# Altium PCB AN9767-2017-05-03.PcbDoc
Units mil, origin at the board's own origin, x right, y up, seen from the top; angles counter-clockwise.
Board outline 3187.61 x 2011 mil, 4 copper layers (TOP, SGND, SVCC, BOTTOM), stack 28.8 mil thick; 3 components, 72 nets, 50 pads, 0 vias.
Unrouted connection lines stored in the file: 7.
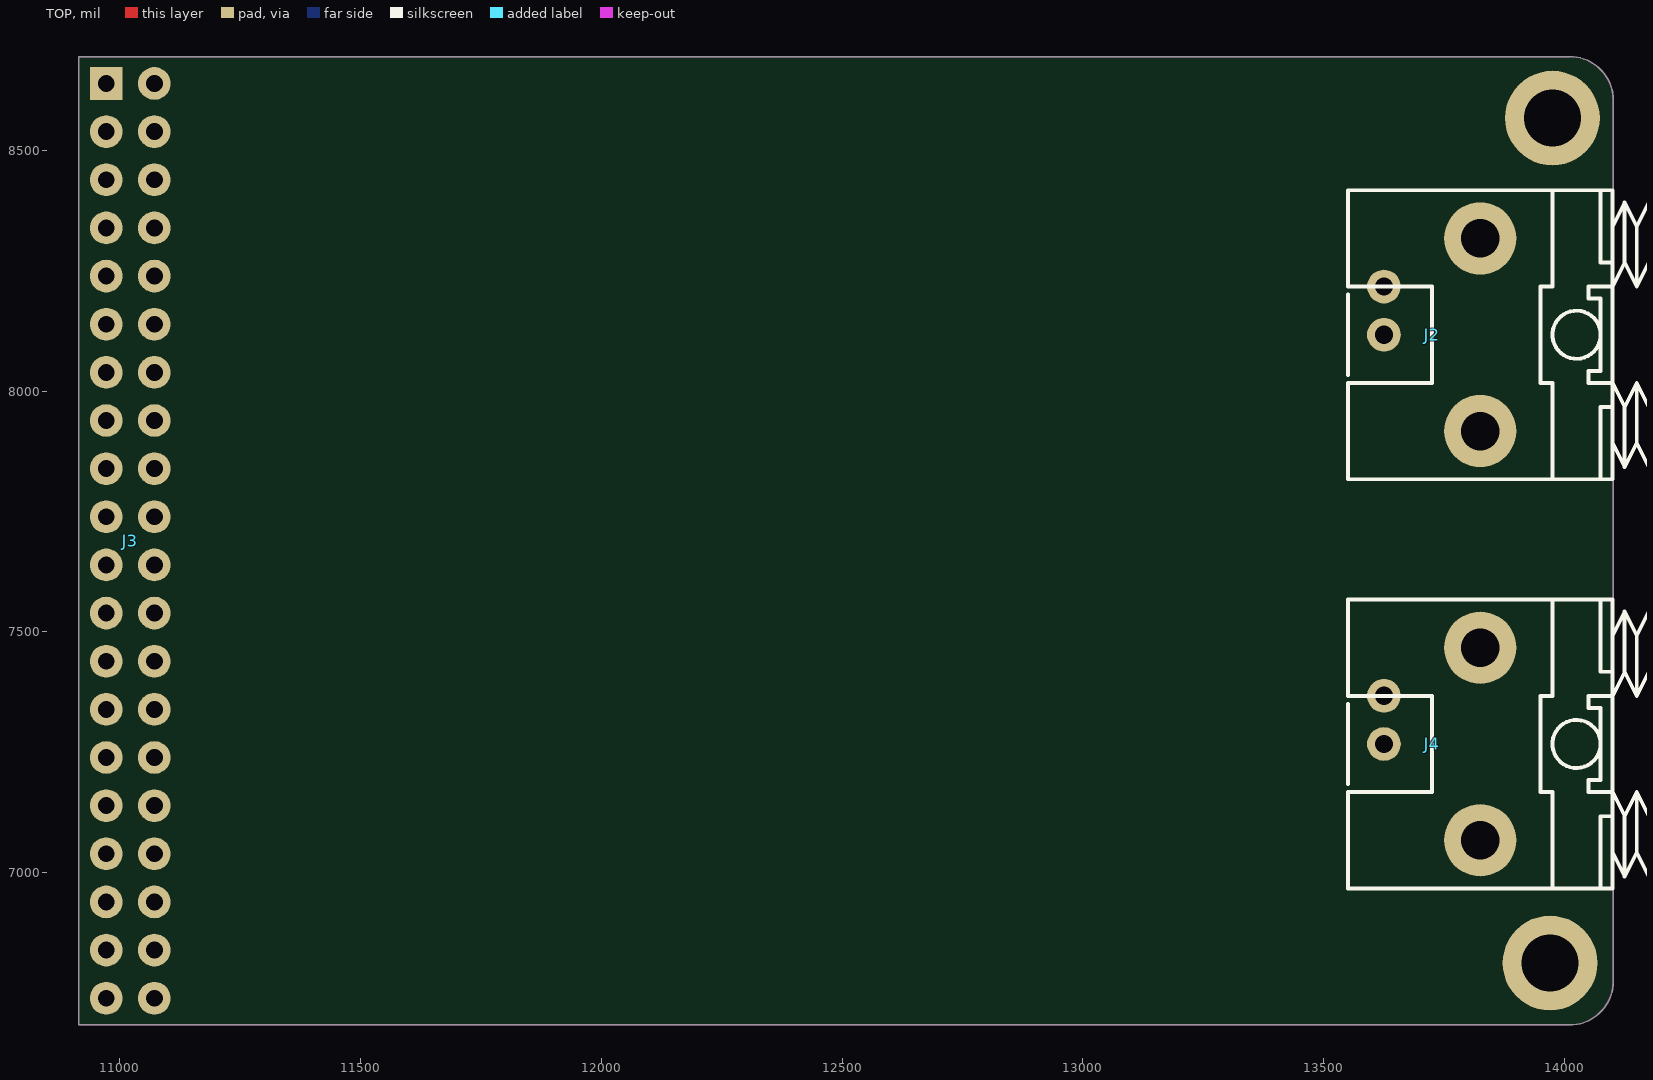
[diagram p0: TOP view]
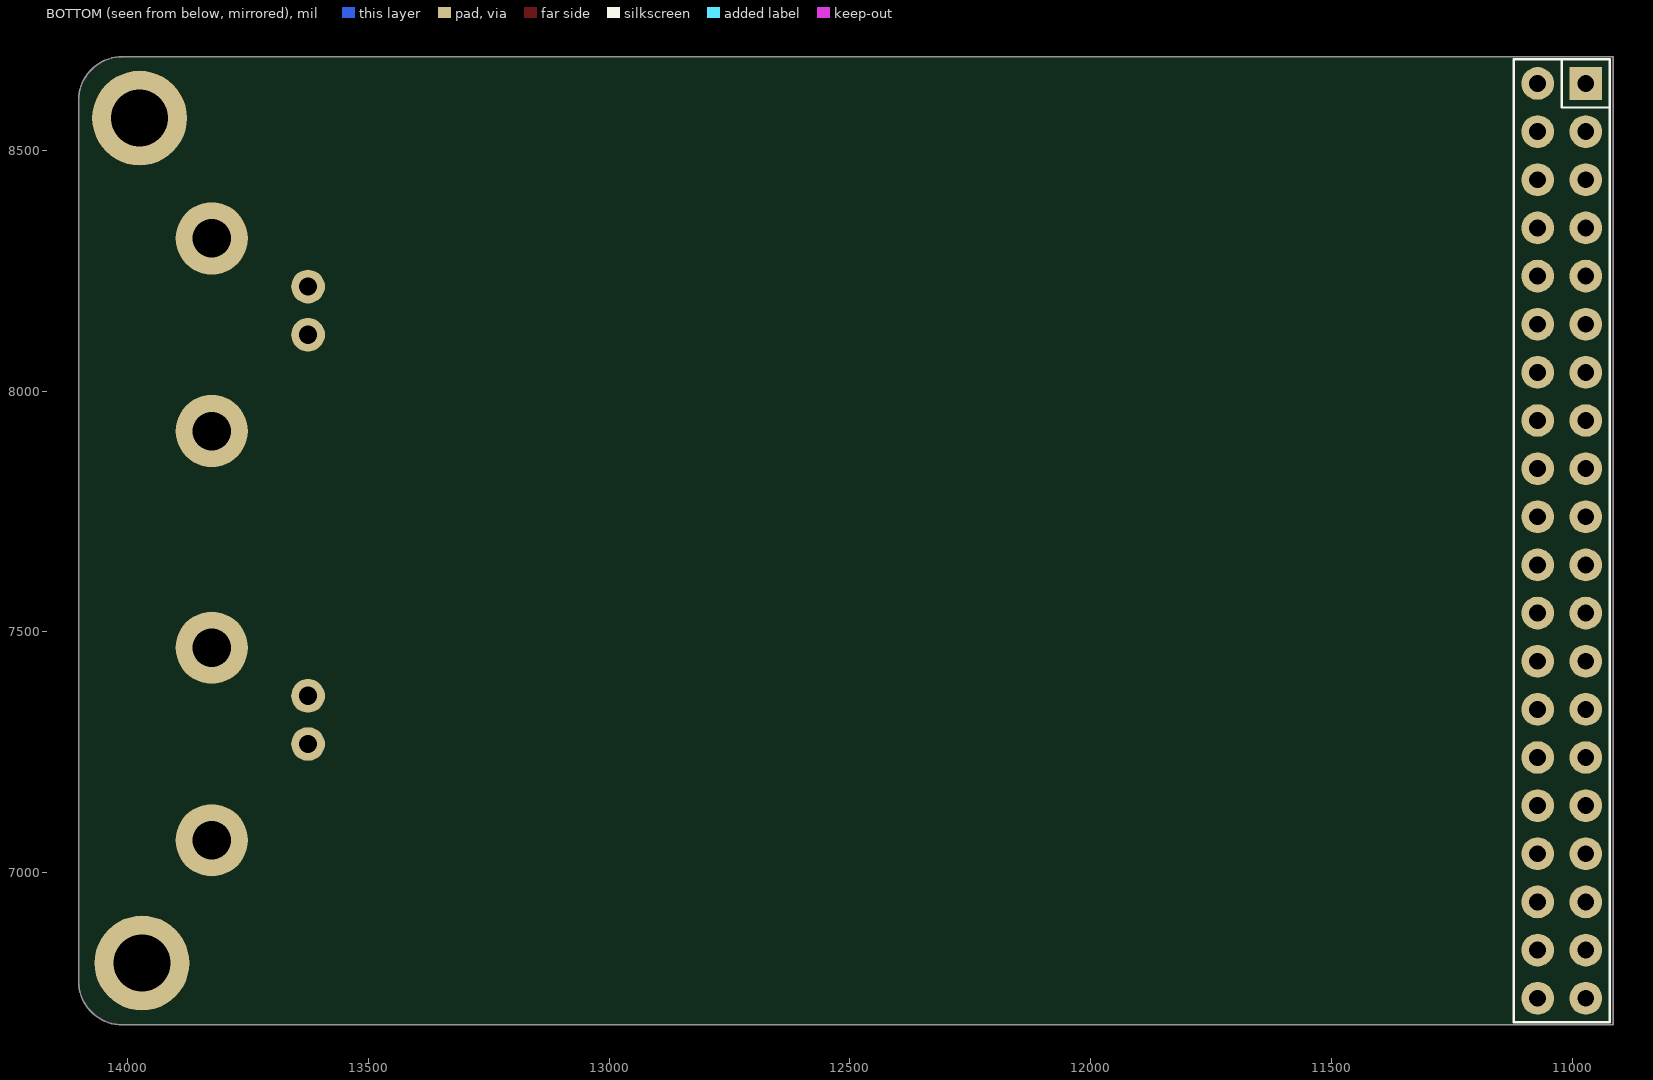
[diagram p1: BOTTOM view, seen from below]
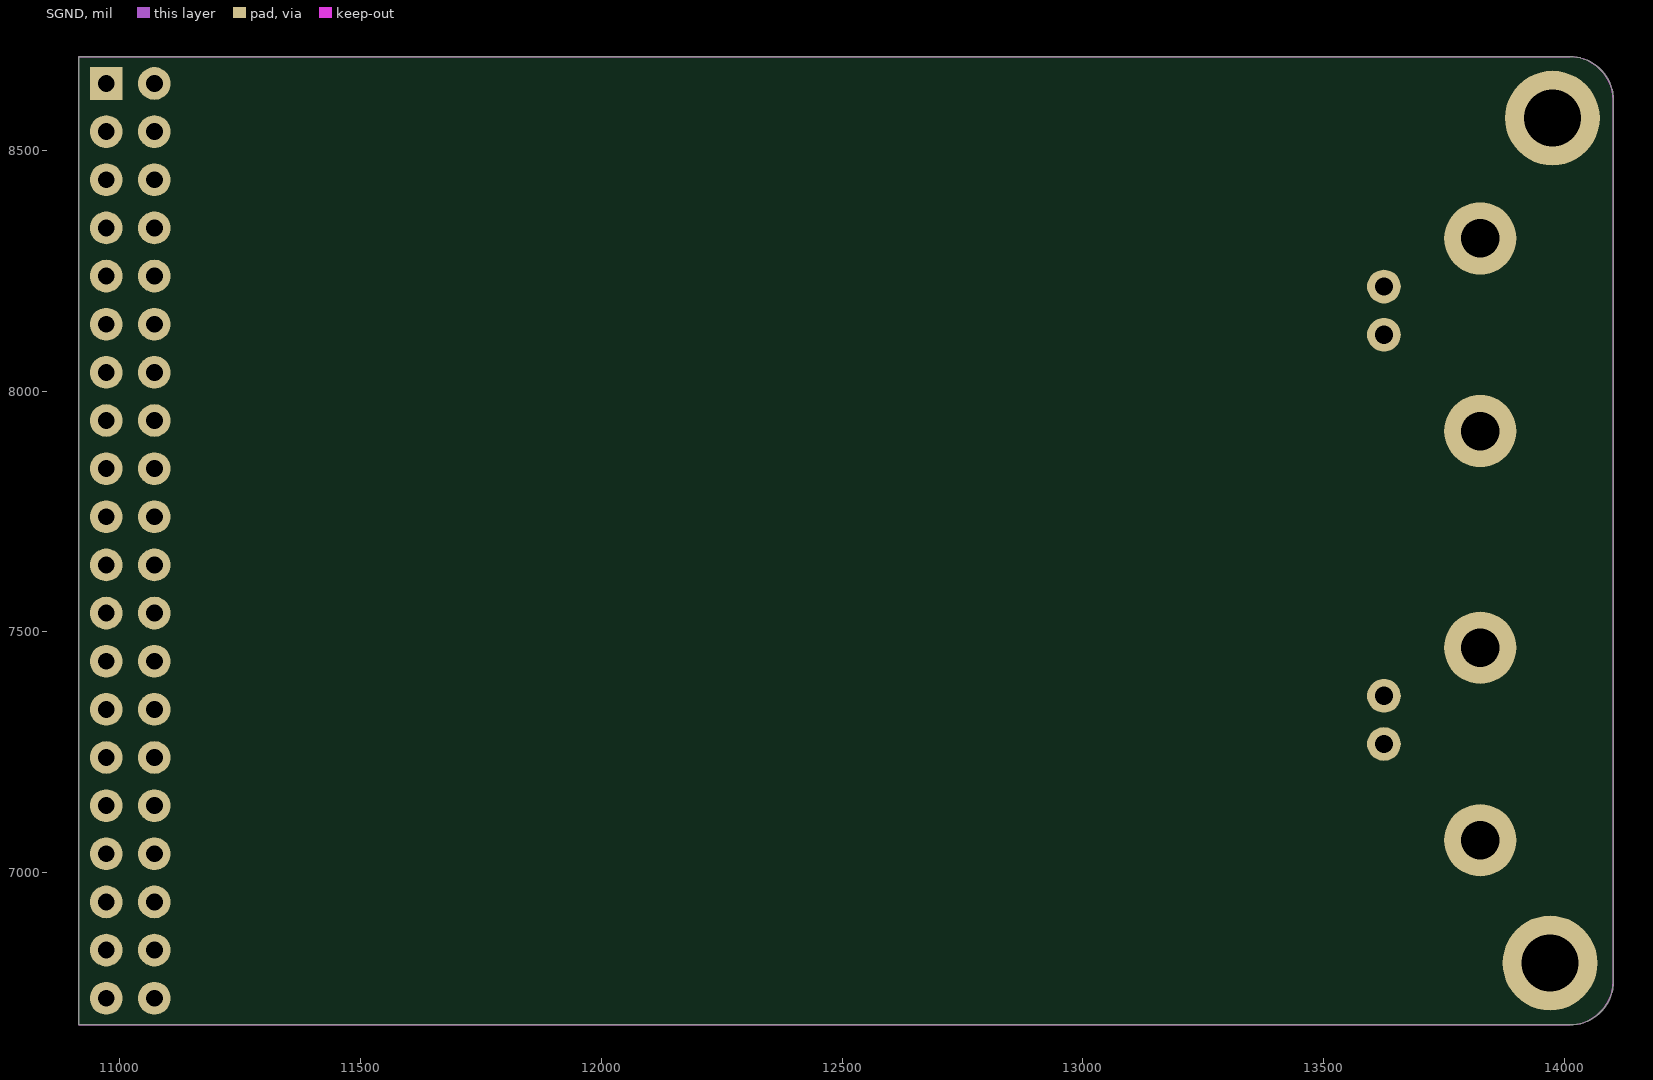
[diagram p2: SGND]

## Layer stack, top to bottom
Top Solder: solder mask 0.4, Solder Resist, Dk 3.5
TOP: signal copper 1.2
Dielectric 1: core 8, FR-4, Dk 4.5
SGND: signal copper 1.2
Dielectric2: core 8, FR-4, Dk 4.5
SVCC: signal copper 1.2
Dielectric3: core 8, FR-4, Dk 4.5
BOTTOM: signal copper 1.2
Bottom Solder: solder mask 0.4, Solder Resist, Dk 3.5

## Board outline
10914.29,6684.32 10914.79,6683.82 14011.4,6683.82 ccw(c14011.4,6774.32) 14101.9,6774.32 14101.9,8604.32 ccw(c14011.4,8604.32) 14011.4,8694.82 10914.79,8694.82 10914.29,8694.32

## Design rules (kind name [scope] priority, off if disabled: settings)
Clearance [All] p1: gap=10
PlaneConnect [All] p1: planeconnectstyle=Direct reliefexpansion=20 reliefentries=4 reliefconductorwidth=10 reliefairgap=10
PolygonConnect [All] p1: connectstyle=Direct reliefconductorwidth=10 reliefentries=4 polygonreliefangle="90 Angle" airgapwidth=10
RoutingVias [All] p1: holewidth=28 width=50 viastyle="Through Hole" minholewidth=28 minwidth=50 maxholewidth=28 maxwidth=50
SolderMaskExpansion [All] p1: expansion=4
Width [All] p1: maxlimit=10 minlimit=10 preferedwidth=10 impedancedriven=TRUE minimp=60.000000 maximp=60.000000 favimp=60.000000
29 further rules are at their usual default settings.

## Components (designator, comment, footprint, x,y, rotation, side; value= is the part's Value field where it differs from the comment)
J2 "HEADER 2_0_BNC_DACOUT" BNC 13745.4,8117.22 r90 top
J3 "CONN PCB 20X2-S_IDC-40P_CONN PC" IDC-40P 11021.5,7689.13 r270 top
J4 "HEADER 2_0_BNC_DACOUT" BNC 13745.4,7267.22 r90 top

## Footprints (in the part's own frame and the unit in brackets; to place one, negate y for a bottom-side part, rotate by r counter-clockwise, add the part's x,y. Pads: shape width x height; smd on the part's side, far side on the other; paste and mask are expansions set on the pad)
BNC [mil] "BNC"
  round 70 hole 38: 1(0,120) 2(100,120)
  round 150 hole 80: 3(-200,-80) 4(200,-80)
  silkscreen extent -300,-922 300,195, body extent -275,-155 275,155, height 150
IDC-40P [mil] "IDC-40P"
  rect 68x68 hole 35: 1(-950,-50)
  round 68 hole 35: 2(-950,50) 3(-850,-50) 4(-850,50) 5(-750,-50) 6(-750,50) 7(-650,-50) 8(-650,50) 9(-550,-50) 10(-550,50) 11(-450,-50) 12(-450,50) 13(-350,-50) 14(-350,50) 15(-250,-50) 16(-250,50) 17(-150,-50) 18(-150,50) 19(-50,-50) 20(-50,50) 21(50,-50) 22(50,50) 23(150,-50) 24(150,50) 25(250,-50) 26(250,50) 27(350,-50) 28(350,50) 29(450,-50) 30(450,50) 31(550,-50) 32(550,50) 33(650,-50) 34(650,50) 35(750,-50) 36(750,50) 37(850,-50) 38(850,50) 39(950,-50) 40(950,50)
  body extent -984,-84 984,84, height 150

## Free pads (board coordinates)
  round 196.85 hole 118.11: 1(13970.4,6812.22) 1(13975.4,8567.22)

## Nets (pads, with @x,y where several pads share a name; then routed paths per layer and width w, separated by ;. In a path a pad name is that pad's centre, name@x,y a point inside that pad or via, vN(x,y) a via of type N, cw(c..) or ccw(c..) an arc to the next point about the centre after c; other vN are vias at no path point)
+5V: J3.2
+6V: 
+6V_AD1: 
+6V_AD2: 
-6V: 
-6V_AD1: 
-6V_AD2: 
A3V3: 
ACOM: J2.2 J2.3 J2.4 J4.2 J4.3 J4.4
D3V3: 
DCOM: J3.1 J3.37 J3.38
N16799601: 
N16799607: 
N16799608: 
N16799613: 
N16799683: 
N16799684: 
N16799689: 
N16799690: 
N16799693: 
N16799695: J2.1
N16799698: 
N16799708: 
N16799709: 
N16799715: 
N16799717: 
N16799719: J4.1
N16799722: 
N16799809: 
N16799825: 
N16799830: 
N16802121: 
N16802139: 
N16802151: 
N16802153: 
N16804035: 
N16804039: 
N16804049: 
N16804061: 
N16804479: 
P1_CLK: J3.18
P1_DATA0: J3.16
P1_DATA1: J3.15
P1_DATA2: J3.14
P1_DATA3: J3.13
P1_DATA4: J3.12
P1_DATA5: J3.11
P1_DATA6: J3.10
P1_DATA7: J3.9
P1_DATA8: J3.8
P1_DATA9: J3.7
P1_DATA10: J3.6
P1_DATA11: J3.5
P1_DATA12: J3.4
P1_DATA13: J3.3
P1_WRT: J3.17
P2_CLK: J3.19
P2_DATA0: J3.34
P2_DATA1: J3.33
P2_DATA2: J3.32
P2_DATA3: J3.31
P2_DATA4: J3.30
P2_DATA5: J3.29
P2_DATA6: J3.28
P2_DATA7: J3.27
P2_DATA8: J3.26
P2_DATA9: J3.25
P2_DATA10: J3.24
P2_DATA11: J3.23
P2_DATA12: J3.22
P2_DATA13: J3.21
P2_WRT: J3.20
pads on no net: J3.35 J3.36 J3.39 J3.40

## Keep-outs
Keep-Out Layer:
  lines w1: 10914.79,6684.32 14003.5,6684.32 14011.4,6684.32 ccw(c14011.4,6774.32) 14101.4,6774.32 14101.4,8604.32 ccw(c14011.4,8604.32) 14011.4,8694.32 10914.79,8694.32 10914.79,6684.32

## Other copper
SGND:
  pour cut-out: 0,0 10,0 10,10 0,10
  pour cut-out: 0,0 10,0 10,10 0,10
  pour cut-out: 0,0 10,0 10,10 0,10
  pour cut-out: 0,0 10,0 10,10 0,10
  pour cut-out: 0,0 10,0 10,10 0,10
  pour cut-out: 0,0 10,0 10,10 0,10
  pour cut-out: 0,0 10,0 10,10 0,10
  pour cut-out: 0,0 10,0 10,10 0,10
  pour cut-out: 0,0 10,0 10,10 0,10
  pour cut-out: 0,0 10,0 10,10 0,10
  pour cut-out: 0,0 10,0 10,10 0,10
  pour cut-out: 0,0 10,0 10,10 0,10
  pour cut-out: 0,0 10,0 10,10 0,10
  pour cut-out: 0,0 10,0 10,10 0,10
  pour cut-out: 0,0 10,0 10,10 0,10
  pour cut-out: 0,0 10,0 10,10 0,10
  pour cut-out: 0,0 10,0 10,10 0,10
  pour cut-out: 0,0 10,0 10,10 0,10
  pour cut-out: 0,0 10,0 10,10 0,10
  pour cut-out: 0,0 10,0 10,10 0,10
  pour cut-out: 0,0 10,0 10,10 0,10
  pour cut-out: 0,0 10,0 10,10 0,10
  pour cut-out: 0,0 10,0 10,10 0,10
  pour cut-out: 0,0 10,0 10,10 0,10
  pour cut-out: 0,0 10,0 10,10 0,10
  pour cut-out: 0,0 10,0 10,10 0,10
  pour cut-out: 0,0 10,0 10,10 0,10
  pour cut-out: 0,0 10,0 10,10 0,10
  pour cut-out: 0,0 10,0 10,10 0,10
  pour cut-out: 0,0 10,0 10,10 0,10
  pour cut-out: 0,0 10,0 10,10 0,10
  pour cut-out: 0,0 10,0 10,10 0,10
  pour cut-out: 0,0 10,0 10,10 0,10
  pour cut-out: 0,0 10,0 10,10 0,10
  pour cut-out: 0,0 10,0 10,10 0,10
  pour cut-out: 0,0 10,0 10,10 0,10
  pour cut-out: 0,0 10,0 10,10 0,10
  pour cut-out: 0,0 10,0 10,10 0,10
  pour cut-out: 0,0 10,0 10,10 0,10
  pour cut-out: 0,0 10,0 10,10 0,10
  pour cut-out: 0,0 10,0 10,10 0,10
  pour cut-out: 0,0 10,0 10,10 0,10
  pour cut-out: 0,0 10,0 10,10 0,10
  pour cut-out: 0,0 10,0 10,10 0,10
  pour cut-out: 0,0 10,0 10,10 0,10
  pour cut-out: 0,0 10,0 10,10 0,10
  pour cut-out: 0,0 10,0 10,10 0,10
  pour cut-out: 0,0 10,0 10,10 0,10
  pour cut-out: 0,0 10,0 10,10 0,10
  pour cut-out: 0,0 10,0 10,10 0,10
  pour cut-out: 0,0 10,0 10,10 0,10
  pour cut-out: 0,0 10,0 10,10 0,10
  pour cut-out: 0,0 10,0 10,10 0,10
  pour cut-out: 0,0 10,0 10,10 0,10
  pour cut-out: 0,0 10,0 10,10 0,10
  pour cut-out: 0,0 10,0 10,10 0,10
  pour cut-out: 0,0 10,0 10,10 0,10
  pour cut-out: 0,0 10,0 10,10 0,10
  pour cut-out: 0,0 10,0 10,10 0,10
  pour cut-out: 0,0 10,0 10,10 0,10
  pour cut-out: 0,0 10,0 10,10 0,10
  pour cut-out: 0,0 10,0 10,10 0,10
  pour cut-out: 0,0 10,0 10,10 0,10
  pour cut-out: 0,0 10,0 10,10 0,10
  pour cut-out: 0,0 10,0 10,10 0,10
  pour cut-out: 0,0 10,0 10,10 0,10
  pour cut-out: 0,0 10,0 10,10 0,10
  pour cut-out: 0,0 10,0 10,10 0,10
  pour cut-out: 0,0 10,0 10,10 0,10
  pour cut-out: 0,0 10,0 10,10 0,10
  pour cut-out: 0,0 10,0 10,10 0,10
  pour cut-out: 0,0 10,0 10,10 0,10
  pour cut-out: 0,0 10,0 10,10 0,10
  pour cut-out: 0,0 10,0 10,10 0,10
  pour cut-out: 0,0 10,0 10,10 0,10
  pour cut-out: 0,0 10,0 10,10 0,10
  pour cut-out: 0,0 10,0 10,10 0,10
  pour cut-out: 0,0 10,0 10,10 0,10
  pour cut-out: 0,0 10,0 10,10 0,10
  pour cut-out: 0,0 10,0 10,10 0,10
  pour cut-out: 13667.78,7267.22 13666.34,7278.19 13662.1,7288.41 13655.37,7297.19 13646.59,7303.92 13636.37,7308.16 13625.4,7309.6 13614.43,7308.16 13604.21,7303.92 13595.43,7297.19 13588.7,7288.41 13584.46,7278.19 13583.02,7267.22 13584.46,7256.25 13588.7,7246.03 13595.43,7237.25 13604.21,7230.52 13614.43,7226.28 13625.4,7224.84 13636.37,7226.28 13646.59,7230.52 13655.37,7237.25 13662.1,7246.03 13666.34,7256.25 13667.78,7267.22
  pour cut-out: 13667.78,7367.22 13666.34,7378.19 13662.1,7388.41 13655.37,7397.19 13646.59,7403.92 13636.37,7408.16 13625.4,7409.6 13614.43,7408.16 13604.21,7403.92 13595.43,7397.19 13588.7,7388.41 13584.46,7378.19 13583.02,7367.22 13584.46,7356.25 13588.7,7346.03 13595.43,7337.25 13604.21,7330.52 13614.43,7326.28 13625.4,7324.84 13636.37,7326.28 13646.59,7330.52 13655.37,7337.25 13662.1,7346.03 13666.34,7356.25 13667.78,7367.22
  pour cut-out: 13667.78,8117.22 13666.34,8128.19 13662.1,8138.41 13655.37,8147.19 13646.59,8153.92 13636.37,8158.16 13625.4,8159.6 13614.43,8158.16 13604.21,8153.92 13595.43,8147.19 13588.7,8138.41 13584.46,8128.19 13583.02,8117.22 13584.46,8106.25 13588.7,8096.03 13595.43,8087.25 13604.21,8080.52 13614.43,8076.28 13625.4,8074.84 13636.37,8076.28 13646.59,8080.52 13655.37,8087.25 13662.1,8096.03 13666.34,8106.25 13667.78,8117.22
  pour cut-out: 13667.78,8217.22 13666.34,8228.19 13662.1,8238.41 13655.37,8247.19 13646.59,8253.92 13636.37,8258.16 13625.4,8259.6 13614.43,8258.16 13604.21,8253.92 13595.43,8247.19 13588.7,8238.41 13584.46,8228.19 13583.02,8217.22 13584.46,8206.25 13588.7,8196.03 13595.43,8187.25 13604.21,8180.52 13614.43,8176.28 13625.4,8174.84 13636.37,8176.28 13646.59,8180.52 13655.37,8187.25 13662.1,8196.03 13666.34,8206.25 13667.78,8217.22
  pour cut-out: 13907.82,7067.22 13906.23,7083.3 13901.54,7098.76 13893.93,7113.01 13883.68,7125.5 13871.19,7135.75 13856.94,7143.36 13841.48,7148.05 13825.4,7149.64 13809.32,7148.05 13793.86,7143.36 13779.61,7135.75 13767.12,7125.5 13756.87,7113.01 13749.26,7098.76 13744.57,7083.3 13742.98,7067.22 13744.57,7051.14 13749.26,7035.68 13756.87,7021.43 13767.12,7008.94 13779.61,6998.69 13793.86,6991.08 13809.32,6986.39 13825.4,6984.8 13841.48,6986.39 13856.94,6991.08 13871.19,6998.69 13883.68,7008.94 13893.93,7021.43 13901.54,7035.68 13906.23,7051.14 13907.82,7067.22
  pour cut-out: 13907.82,7467.22 13906.23,7483.3 13901.54,7498.76 13893.93,7513.01 13883.68,7525.5 13871.19,7535.75 13856.94,7543.36 13841.48,7548.05 13825.4,7549.64 13809.32,7548.05 13793.86,7543.36 13779.61,7535.75 13767.12,7525.5 13756.87,7513.01 13749.26,7498.76 13744.57,7483.3 13742.98,7467.22 13744.57,7451.14 13749.26,7435.68 13756.87,7421.43 13767.12,7408.94 13779.61,7398.69 13793.86,7391.08 13809.32,7386.39 13825.4,7384.8 13841.48,7386.39 13856.94,7391.08 13871.19,7398.69 13883.68,7408.94 13893.93,7421.43 13901.54,7435.68 13906.23,7451.14 13907.82,7467.22
  pour cut-out: 13907.82,7917.22 13906.23,7933.3 13901.54,7948.76 13893.93,7963.01 13883.68,7975.5 13871.19,7985.75 13856.94,7993.36 13841.48,7998.05 13825.4,7999.64 13809.32,7998.05 13793.86,7993.36 13779.61,7985.75 13767.12,7975.5 13756.87,7963.01 13749.26,7948.76 13744.57,7933.3 13742.98,7917.22 13744.57,7901.14 13749.26,7885.68 13756.87,7871.43 13767.12,7858.94 13779.61,7848.69 13793.86,7841.08 13809.32,7836.39 13825.4,7834.8 13841.48,7836.39 13856.94,7841.08 13871.19,7848.69 13883.68,7858.94 13893.93,7871.43 13901.54,7885.68 13906.23,7901.14 13907.82,7917.22
  pour cut-out: 13907.82,8317.22 13906.23,8333.3 13901.54,8348.76 13893.93,8363.01 13883.68,8375.5 13871.19,8385.75 13856.94,8393.36 13841.48,8398.05 13825.4,8399.64 13809.32,8398.05 13793.86,8393.36 13779.61,8385.75 13767.12,8375.5 13756.87,8363.01 13749.26,8348.76 13744.57,8333.3 13742.98,8317.22 13744.57,8301.14 13749.26,8285.68 13756.87,8271.43 13767.12,8258.94 13779.61,8248.69 13793.86,8241.08 13809.32,8236.39 13825.4,8234.8 13841.48,8236.39 13856.94,8241.08 13871.19,8248.69 13883.68,8258.94 13893.93,8271.43 13901.54,8285.68 13906.23,8301.14 13907.82,8317.22
  pour cut-out: 0,0 10,0 10,10 0,10
  pour cut-out: 0,0 10,0 10,10 0,10
  pour cut-out: 0,0 10,0 10,10 0,10
  pour cut-out: 0,0 10,0 10,10 0,10
  pour cut-out: 0,0 10,0 10,10 0,10
  pour cut-out: 0,0 10,0 10,10 0,10
  pour cut-out: 0,0 10,0 10,10 0,10
  pour cut-out: 0,0 10,0 10,10 0,10
  pour cut-out: 0,0 10,0 10,10 0,10
  pour cut-out: 0,0 10,0 10,10 0,10
  pour cut-out: 0,0 10,0 10,10 0,10
  pour cut-out: 0,0 10,0 10,10 0,10
BOTTOM:
  pour cut-out: 0,0 10,0 10,10 0,10
  pour cut-out: 0,0 10,0 10,10 0,10
  pour cut-out: 0,0 10,0 10,10 0,10
  pour cut-out: 0,0 10,0 10,10 0,10
  pour cut-out: 0,0 10,0 10,10 0,10
  pour cut-out: 0,0 10,0 10,10 0,10
  pour cut-out: 0,0 10,0 10,10 0,10
  pour cut-out: 0,0 10,0 10,10 0,10
  pour cut-out: 0,0 10,0 10,10 0,10
  pour cut-out: 0,0 10,0 10,10 0,10
  pour cut-out: 0,0 10,0 10,10 0,10
  pour cut-out: 0,0 10,0 10,10 0,10
  pour cut-out: 0,0 10,0 10,10 0,10
  pour cut-out: 0,0 10,0 10,10 0,10
  pour cut-out: 0,0 10,0 10,10 0,10
  pour cut-out: 0,0 10,0 10,10 0,10
  pour cut-out: 0,0 10,0 10,10 0,10
  pour cut-out: 0,0 10,0 10,10 0,10
  pour cut-out: 0,0 10,0 10,10 0,10
  pour cut-out: 0,0 10,0 10,10 0,10
  pour cut-out: 0,0 10,0 10,10 0,10
  pour cut-out: 0,0 10,0 10,10 0,10
  pour cut-out: 0,0 10,0 10,10 0,10
  pour cut-out: 0,0 10,0 10,10 0,10
  pour cut-out: 0,0 10,0 10,10 0,10
  pour cut-out: 0,0 10,0 10,10 0,10
  pour cut-out: 0,0 10,0 10,10 0,10
  pour cut-out: 0,0 10,0 10,10 0,10
  pour cut-out: 0,0 10,0 10,10 0,10
  pour cut-out: 0,0 10,0 10,10 0,10
  pour cut-out: 0,0 10,0 10,10 0,10
  pour cut-out: 0,0 10,0 10,10 0,10
  pour cut-out: 0,0 10,0 10,10 0,10
  pour cut-out: 0,0 10,0 10,10 0,10
  pour cut-out: 0,0 10,0 10,10 0,10
  pour cut-out: 0,0 10,0 10,10 0,10
  pour cut-out: 0,0 10,0 10,10 0,10
  pour cut-out: 0,0 10,0 10,10 0,10
  pour cut-out: 0,0 10,0 10,10 0,10
  pour cut-out: 0,0 10,0 10,10 0,10
  pour cut-out: 0,0 10,0 10,10 0,10
  pour cut-out: 0,0 10,0 10,10 0,10
  pour cut-out: 0,0 10,0 10,10 0,10
  pour cut-out: 0,0 10,0 10,10 0,10
  pour cut-out: 0,0 10,0 10,10 0,10
  pour cut-out: 0,0 10,0 10,10 0,10
  pour cut-out: 0,0 10,0 10,10 0,10
  pour cut-out: 0,0 10,0 10,10 0,10
  pour cut-out: 0,0 10,0 10,10 0,10
  pour cut-out: 0,0 10,0 10,10 0,10
  pour cut-out: 0,0 10,0 10,10 0,10
  pour cut-out: 0,0 10,0 10,10 0,10
  pour cut-out: 0,0 10,0 10,10 0,10
  pour cut-out: 0,0 10,0 10,10 0,10
  pour cut-out: 0,0 10,0 10,10 0,10
  pour cut-out: 0,0 10,0 10,10 0,10
  pour cut-out: 0,0 10,0 10,10 0,10
  pour cut-out: 0,0 10,0 10,10 0,10
  pour cut-out: 0,0 10,0 10,10 0,10
  pour cut-out: 0,0 10,0 10,10 0,10
  pour cut-out: 0,0 10,0 10,10 0,10
  pour cut-out: 0,0 10,0 10,10 0,10
  pour cut-out: 0,0 10,0 10,10 0,10
  pour cut-out: 0,0 10,0 10,10 0,10
  pour cut-out: 0,0 10,0 10,10 0,10
  pour cut-out: 0,0 10,0 10,10 0,10
  pour cut-out: 0,0 10,0 10,10 0,10
  pour cut-out: 0,0 10,0 10,10 0,10
  pour cut-out: 0,0 10,0 10,10 0,10
  pour cut-out: 0,0 10,0 10,10 0,10
  pour cut-out: 0,0 10,0 10,10 0,10
  pour cut-out: 0,0 10,0 10,10 0,10
  pour cut-out: 13667.78,7267.22 13666.34,7278.19 13662.1,7288.41 13655.37,7297.19 13646.59,7303.92 13636.37,7308.16 13625.4,7309.6 13614.43,7308.16 13604.21,7303.92 13595.43,7297.19 13588.7,7288.41 13584.46,7278.19 13583.02,7267.22 13584.46,7256.25 13588.7,7246.03 13595.43,7237.25 13604.21,7230.52 13614.43,7226.28 13625.4,7224.84 13636.37,7226.28 13646.59,7230.52 13655.37,7237.25 13662.1,7246.03 13666.34,7256.25 13667.78,7267.22
  pour cut-out: 13667.78,7367.22 13666.34,7378.19 13662.1,7388.41 13655.37,7397.19 13646.59,7403.92 13636.37,7408.16 13625.4,7409.6 13614.43,7408.16 13604.21,7403.92 13595.43,7397.19 13588.7,7388.41 13584.46,7378.19 13583.02,7367.22 13584.46,7356.25 13588.7,7346.03 13595.43,7337.25 13604.21,7330.52 13614.43,7326.28 13625.4,7324.84 13636.37,7326.28 13646.59,7330.52 13655.37,7337.25 13662.1,7346.03 13666.34,7356.25 13667.78,7367.22
  pour cut-out: 13667.78,8117.22 13666.34,8128.19 13662.1,8138.41 13655.37,8147.19 13646.59,8153.92 13636.37,8158.16 13625.4,8159.6 13614.43,8158.16 13604.21,8153.92 13595.43,8147.19 13588.7,8138.41 13584.46,8128.19 13583.02,8117.22 13584.46,8106.25 13588.7,8096.03 13595.43,8087.25 13604.21,8080.52 13614.43,8076.28 13625.4,8074.84 13636.37,8076.28 13646.59,8080.52 13655.37,8087.25 13662.1,8096.03 13666.34,8106.25 13667.78,8117.22
  pour cut-out: 13667.78,8217.22 13666.34,8228.19 13662.1,8238.41 13655.37,8247.19 13646.59,8253.92 13636.37,8258.16 13625.4,8259.6 13614.43,8258.16 13604.21,8253.92 13595.43,8247.19 13588.7,8238.41 13584.46,8228.19 13583.02,8217.22 13584.46,8206.25 13588.7,8196.03 13595.43,8187.25 13604.21,8180.52 13614.43,8176.28 13625.4,8174.84 13636.37,8176.28 13646.59,8180.52 13655.37,8187.25 13662.1,8196.03 13666.34,8206.25 13667.78,8217.22
  pour cut-out: 13907.82,7067.22 13906.23,7083.3 13901.54,7098.76 13893.93,7113.01 13883.68,7125.5 13871.19,7135.75 13856.94,7143.36 13841.48,7148.05 13825.4,7149.64 13809.32,7148.05 13793.86,7143.36 13779.61,7135.75 13767.12,7125.5 13756.87,7113.01 13749.26,7098.76 13744.57,7083.3 13742.98,7067.22 13744.57,7051.14 13749.26,7035.68 13756.87,7021.43 13767.12,7008.94 13779.61,6998.69 13793.86,6991.08 13809.32,6986.39 13825.4,6984.8 13841.48,6986.39 13856.94,6991.08 13871.19,6998.69 13883.68,7008.94 13893.93,7021.43 13901.54,7035.68 13906.23,7051.14 13907.82,7067.22
  pour cut-out: 13907.82,7467.22 13906.23,7483.3 13901.54,7498.76 13893.93,7513.01 13883.68,7525.5 13871.19,7535.75 13856.94,7543.36 13841.48,7548.05 13825.4,7549.64 13809.32,7548.05 13793.86,7543.36 13779.61,7535.75 13767.12,7525.5 13756.87,7513.01 13749.26,7498.76 13744.57,7483.3 13742.98,7467.22 13744.57,7451.14 13749.26,7435.68 13756.87,7421.43 13767.12,7408.94 13779.61,7398.69 13793.86,7391.08 13809.32,7386.39 13825.4,7384.8 13841.48,7386.39 13856.94,7391.08 13871.19,7398.69 13883.68,7408.94 13893.93,7421.43 13901.54,7435.68 13906.23,7451.14 13907.82,7467.22
  pour cut-out: 13907.82,7917.22 13906.23,7933.3 13901.54,7948.76 13893.93,7963.01 13883.68,7975.5 13871.19,7985.75 13856.94,7993.36 13841.48,7998.05 13825.4,7999.64 13809.32,7998.05 13793.86,7993.36 13779.61,7985.75 13767.12,7975.5 13756.87,7963.01 13749.26,7948.76 13744.57,7933.3 13742.98,7917.22 13744.57,7901.14 13749.26,7885.68 13756.87,7871.43 13767.12,7858.94 13779.61,7848.69 13793.86,7841.08 13809.32,7836.39 13825.4,7834.8 13841.48,7836.39 13856.94,7841.08 13871.19,7848.69 13883.68,7858.94 13893.93,7871.43 13901.54,7885.68 13906.23,7901.14 13907.82,7917.22
  pour cut-out: 13907.82,8317.22 13906.23,8333.3 13901.54,8348.76 13893.93,8363.01 13883.68,8375.5 13871.19,8385.75 13856.94,8393.36 13841.48,8398.05 13825.4,8399.64 13809.32,8398.05 13793.86,8393.36 13779.61,8385.75 13767.12,8375.5 13756.87,8363.01 13749.26,8348.76 13744.57,8333.3 13742.98,8317.22 13744.57,8301.14 13749.26,8285.68 13756.87,8271.43 13767.12,8258.94 13779.61,8248.69 13793.86,8241.08 13809.32,8236.39 13825.4,8234.8 13841.48,8236.39 13856.94,8241.08 13871.19,8248.69 13883.68,8258.94 13893.93,8271.43 13901.54,8285.68 13906.23,8301.14 13907.82,8317.22
  pour cut-out: 0,0 10,0 10,10 0,10
  pour cut-out: 0,0 10,0 10,10 0,10
  pour cut-out: 0,0 10,0 10,10 0,10
  pour cut-out: 0,0 10,0 10,10 0,10
  pour cut-out: 0,0 10,0 10,10 0,10
  pour cut-out: 0,0 10,0 10,10 0,10
  pour cut-out: 0,0 10,0 10,10 0,10
  pour cut-out: 0,0 10,0 10,10 0,10
  pour cut-out: 0,0 10,0 10,10 0,10
  pour cut-out: 0,0 10,0 10,10 0,10
  pour cut-out: 0,0 10,0 10,10 0,10
  pour cut-out: 0,0 10,0 10,10 0,10
  pour cut-out: 0,0 10,0 10,10 0,10
  pour cut-out: 0,0 10,0 10,10 0,10
  pour cut-out: 0,0 10,0 10,10 0,10
  pour cut-out: 0,0 10,0 10,10 0,10
  pour cut-out: 0,0 10,0 10,10 0,10
  pour cut-out: 0,0 10,0 10,10 0,10
  pour cut-out: 0,0 10,0 10,10 0,10
  pour cut-out: 0,0 10,0 10,10 0,10
  pour cut-out: 0,0 10,0 10,10 0,10
  pour cut-out: 0,0 10,0 10,10 0,10
  pour cut-out: 0,0 10,0 10,10 0,10
  pour cut-out: 0,0 10,0 10,10 0,10
  pour cut-out: 0,0 10,0 10,10 0,10
  pour cut-out: 0,0 10,0 10,10 0,10
  pour cut-out: 0,0 10,0 10,10 0,10
  pour cut-out: 0,0 10,0 10,10 0,10
  pour cut-out: 0,0 10,0 10,10 0,10
  pour cut-out: 0,0 10,0 10,10 0,10
  pour cut-out: 0,0 10,0 10,10 0,10
  pour cut-out: 0,0 10,0 10,10 0,10
  pour cut-out: 0,0 10,0 10,10 0,10
  pour cut-out: 0,0 10,0 10,10 0,10
  pour cut-out: 0,0 10,0 10,10 0,10
  pour cut-out: 0,0 10,0 10,10 0,10
  pour cut-out: 0,0 10,0 10,10 0,10
  pour cut-out: 0,0 10,0 10,10 0,10
  pour cut-out: 0,0 10,0 10,10 0,10
  pour cut-out: 0,0 10,0 10,10 0,10
  pour cut-out: 0,0 10,0 10,10 0,10
  pour cut-out: 0,0 10,0 10,10 0,10
  pour cut-out: 0,0 10,0 10,10 0,10
  pour cut-out: 0,0 10,0 10,10 0,10
  pour cut-out: 0,0 10,0 10,10 0,10
  pour cut-out: 0,0 10,0 10,10 0,10
  pour cut-out: 0,0 10,0 10,10 0,10
  pour cut-out: 0,0 10,0 10,10 0,10
  pour cut-out: 0,0 10,0 10,10 0,10
  pour cut-out: 0,0 10,0 10,10 0,10
  pour cut-out: 0,0 10,0 10,10 0,10

## Silkscreen, mask and mechanical layers (free items; w line width, h text height)
PEN3:
  drawing of 669 lines, arcs and shapes, not listed
DIMENSION-1:
  lines w1: 10379.4,6836.22 10404.4,6686.22 ; 10379.4,6836.22 10429.4,6836.22 ; 10379.4,6836.22 10404.4,6686.22 ; 10379.4,6836.22 10429.4,6836.22 ; 10379.4,8545.22 10404.4,8695.22 ; 10379.4,8545.22 10429.4,8545.22 ; 10379.4,8545.22 10404.4,8695.22 ; 10379.4,8545.22 10429.4,8545.22 ; 10404.4,6686.22 10429.4,6836.22 ; 10404.4,6686.22 10404.4,7559.97 10404.4,6686.22 ; 10404.4,6686.22 10429.4,6836.22 ; 10404.4,8695.22 10429.4,8545.22 ; 10404.4,8695.22 10404.4,7872.47 10404.4,8695.22 ; 10404.4,8695.22 10429.4,8545.22 ; 10919.4,6292.22 11069.4,6317.22 ; 10919.4,6292.22 11069.4,6267.22 ; 10919.4,6292.22 12112.15,6292.22 10919.4,6292.22 ; 10919.4,6292.22 11069.4,6317.22 ; 10919.4,6292.22 11069.4,6267.22 ; 11069.4,6267.22 11069.4,6317.22 ; 11069.4,6267.22 11069.4,6317.22 ; 13960.4,6267.22 14110.4,6292.22 ; 13960.4,6267.22 13960.4,6317.22 ; 13960.4,6267.22 14110.4,6292.22 ; 13960.4,6267.22 13960.4,6317.22 ; 13960.4,6317.22 14110.4,6292.22 ; 13960.4,6317.22 14110.4,6292.22 ; 14110.4,6292.22 12764.65,6292.22 14110.4,6292.22 ; 10304.4,6686.22 10886.4,6686.22 10304.4,6686.22 ; 10304.4,8695.22 10902.4,8695.22 10304.4,8695.22 ; 10919.4,6192.22 10919.4,6650.22 10919.4,6192.22 ; 14110.4,6192.22 14110.4,6739.22 14110.4,6192.22
  text "51MM" at 10109.9,7653.72 h125
  text "51MM" at 10109.9,7653.72 h125
  text "81MM" at 12205.9,6229.72 h125
  text "81MM" at 12205.9,6229.72 h125
DRAWING_ORIGIN:
  lines w1: 8820.4,5497.22 8870.4,5497.22 ; 8845.4,5472.22 8845.4,5522.22
PIN_NUMBER:
  text "1" at 13965.4,8567.22 h25
  text "1" at 13960.4,6812.22 h25
ASSEMBLY_TOP:
  lines w1: 13871.98,6713.8 14068.82,6713.8 14068.82,6910.64 13871.98,6910.64 13871.98,6713.8 ; 13876.98,8468.8 14073.82,8468.8 14073.82,8665.64 13876.98,8665.64 13876.98,8468.8
  text "U*" at 13969.4,8563.22 h25
  text "U*" at 13964.4,6808.22 h25
PLACE_BOUND_TOP:
  region: 13871.98,6713.8 14068.82,6713.8 14068.82,6910.64 13871.98,6910.64
  region: 13876.98,8468.8 14073.82,8468.8 14073.82,8665.64 13876.98,8665.64

## Text inside footprints (layer, text, board x,y; h text height)
J2: PIN_NUMBER "1" at 13615.4,8117.22 h25 r90; PIN_NUMBER "4" at 13815.4,8317.22 h25 r90; PIN_NUMBER "3" at 13815.4,7917.22 h25 r90; PIN_NUMBER "2" at 13615.4,8217.22 h25 r90
J3: PIN_NUMBER "20" at 11051.5,7739.13 h25 r270; PIN_NUMBER "19" at 10951.5,7739.13 h25 r270; PIN_NUMBER "21" at 10951.5,7639.13 h25 r270; PIN_NUMBER "2" at 11061.5,8639.13 h25 r270; PIN_NUMBER "22" at 11051.5,7639.13 h25 r270; PIN_NUMBER "23" at 10951.5,7539.13 h25 r270; PIN_NUMBER "24" at 11051.5,7539.13 h25 r270; PIN_NUMBER "25" at 10951.5,7439.13 h25 r270; PIN_NUMBER "26" at 11051.5,7439.13 h25 r270; PIN_NUMBER "27" at 10951.5,7339.13 h25 r270; PIN_NUMBER "28" at 11051.5,7339.13 h25 r270; PIN_NUMBER "29" at 10951.5,7239.13 h25 r270; PIN_NUMBER "30" at 11051.5,7239.13 h25 r270; PIN_NUMBER "31" at 10951.5,7139.13 h25 r270; PIN_NUMBER "32" at 11051.5,7139.13 h25 r270; PIN_NUMBER "33" at 10951.5,7039.13 h25 r270; PIN_NUMBER "34" at 11051.5,7039.13 h25 r270; PIN_NUMBER "17" at 10951.5,7839.13 h25 r270; PIN_NUMBER "18" at 11051.5,7839.13 h25 r270; PIN_NUMBER "3" at 10961.5,8539.13 h25 r270; PIN_NUMBER "4" at 11061.5,8539.13 h25 r270; PIN_NUMBER "5" at 10961.5,8439.13 h25 r270; PIN_NUMBER "6" at 11061.5,8439.13 h25 r270; PIN_NUMBER "7" at 10961.5,8339.13 h25 r270; PIN_NUMBER "8" at 11061.5,8339.13 h25 r270; PIN_NUMBER "9" at 10961.5,8239.13 h25 r270; PIN_NUMBER "10" at 11051.5,8239.13 h25 r270; PIN_NUMBER "11" at 10951.5,8139.13 h25 r270; PIN_NUMBER "12" at 11051.5,8139.13 h25 r270; PIN_NUMBER "13" at 10951.5,8039.13 h25 r270; PIN_NUMBER "14" at 11051.5,8039.13 h25 r270; PIN_NUMBER "15" at 10951.5,7939.13 h25 r270; PIN_NUMBER "16" at 11051.5,7939.13 h25 r270; PIN_NUMBER "1" at 10961.5,8639.13 h25 r270; PIN_NUMBER "38" at 11051.5,6839.13 h25 r270; PIN_NUMBER "37" at 10951.5,6839.13 h25 r270; PIN_NUMBER "35" at 10951.5,6939.13 h25 r270; PIN_NUMBER "39" at 10951.5,6739.13 h25 r270; PIN_NUMBER "36" at 11051.5,6939.13 h25 r270; PIN_NUMBER "40" at 11051.5,6739.13 h25 r270
J4: PIN_NUMBER "1" at 13615.4,7267.22 h25 r90; PIN_NUMBER "4" at 13815.4,7467.22 h25 r90; PIN_NUMBER "3" at 13815.4,7067.22 h25 r90; PIN_NUMBER "2" at 13615.4,7367.22 h25 r90